# Altium PCB Feeder_1U_NEW.PcbDoc
Units mm, origin at the board's own origin, x right, y up, seen from the top; angles counter-clockwise.
Board outline 51.57 x 89 mm, 4 copper layers (TOP, GND_T, GND_B, BOTTOM), stack 1.484 mm thick; 80 components, 49 nets, 266 pads, 177 vias.
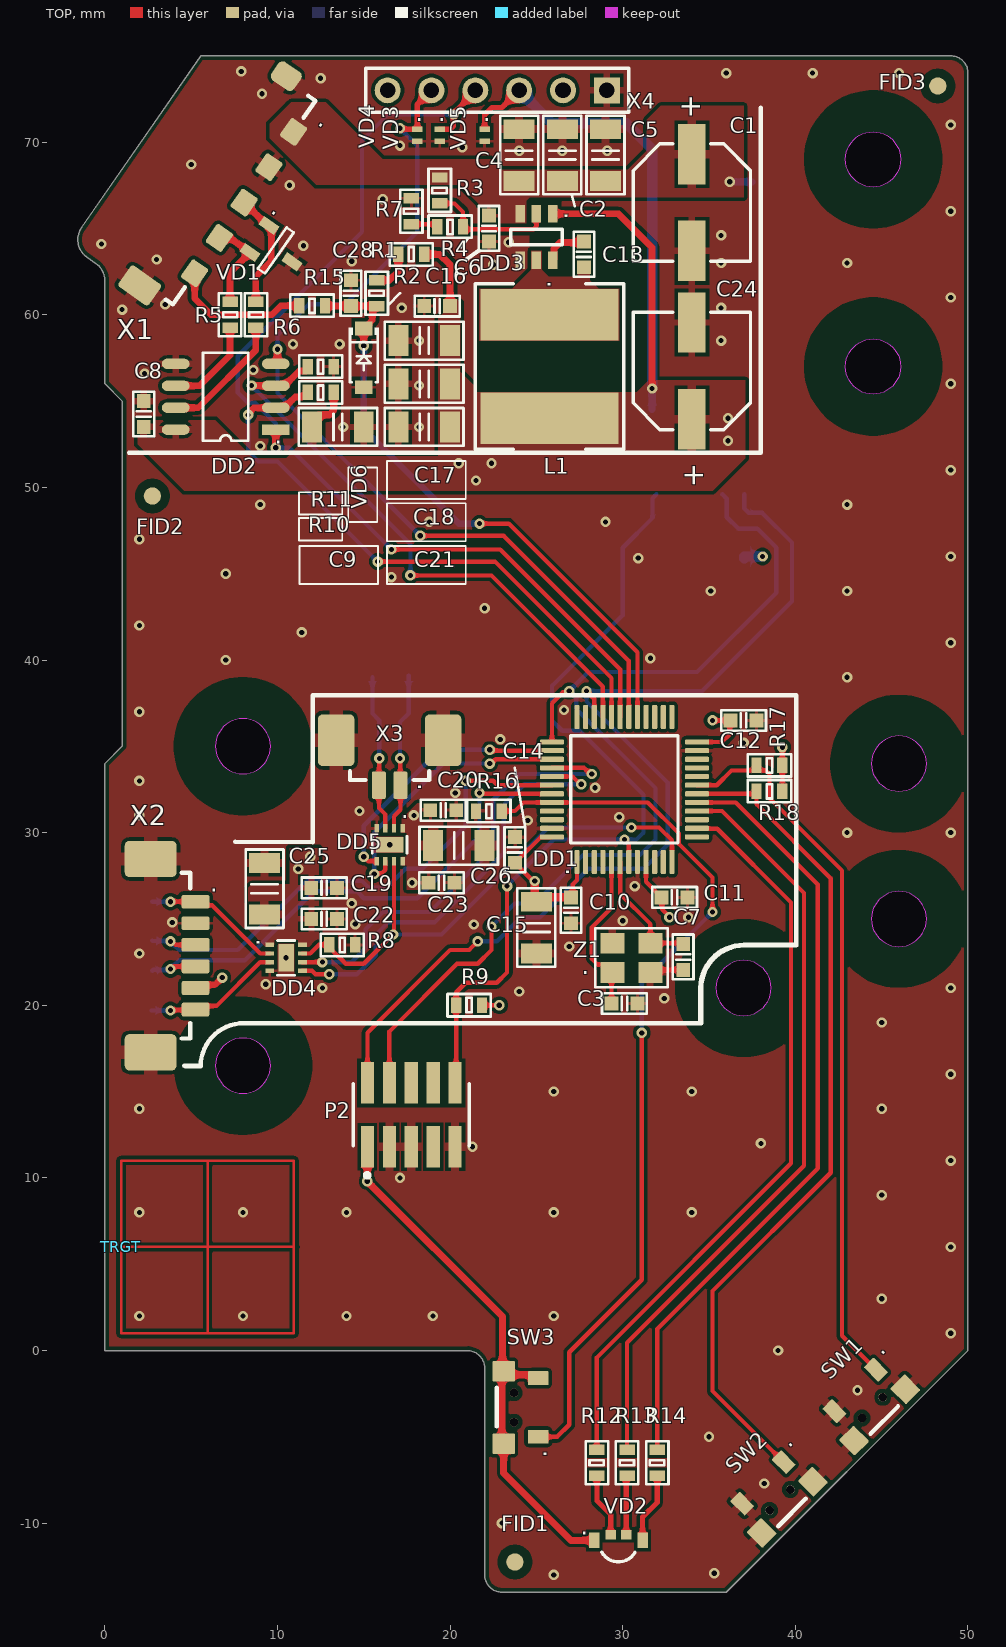
[diagram p0: TOP view]
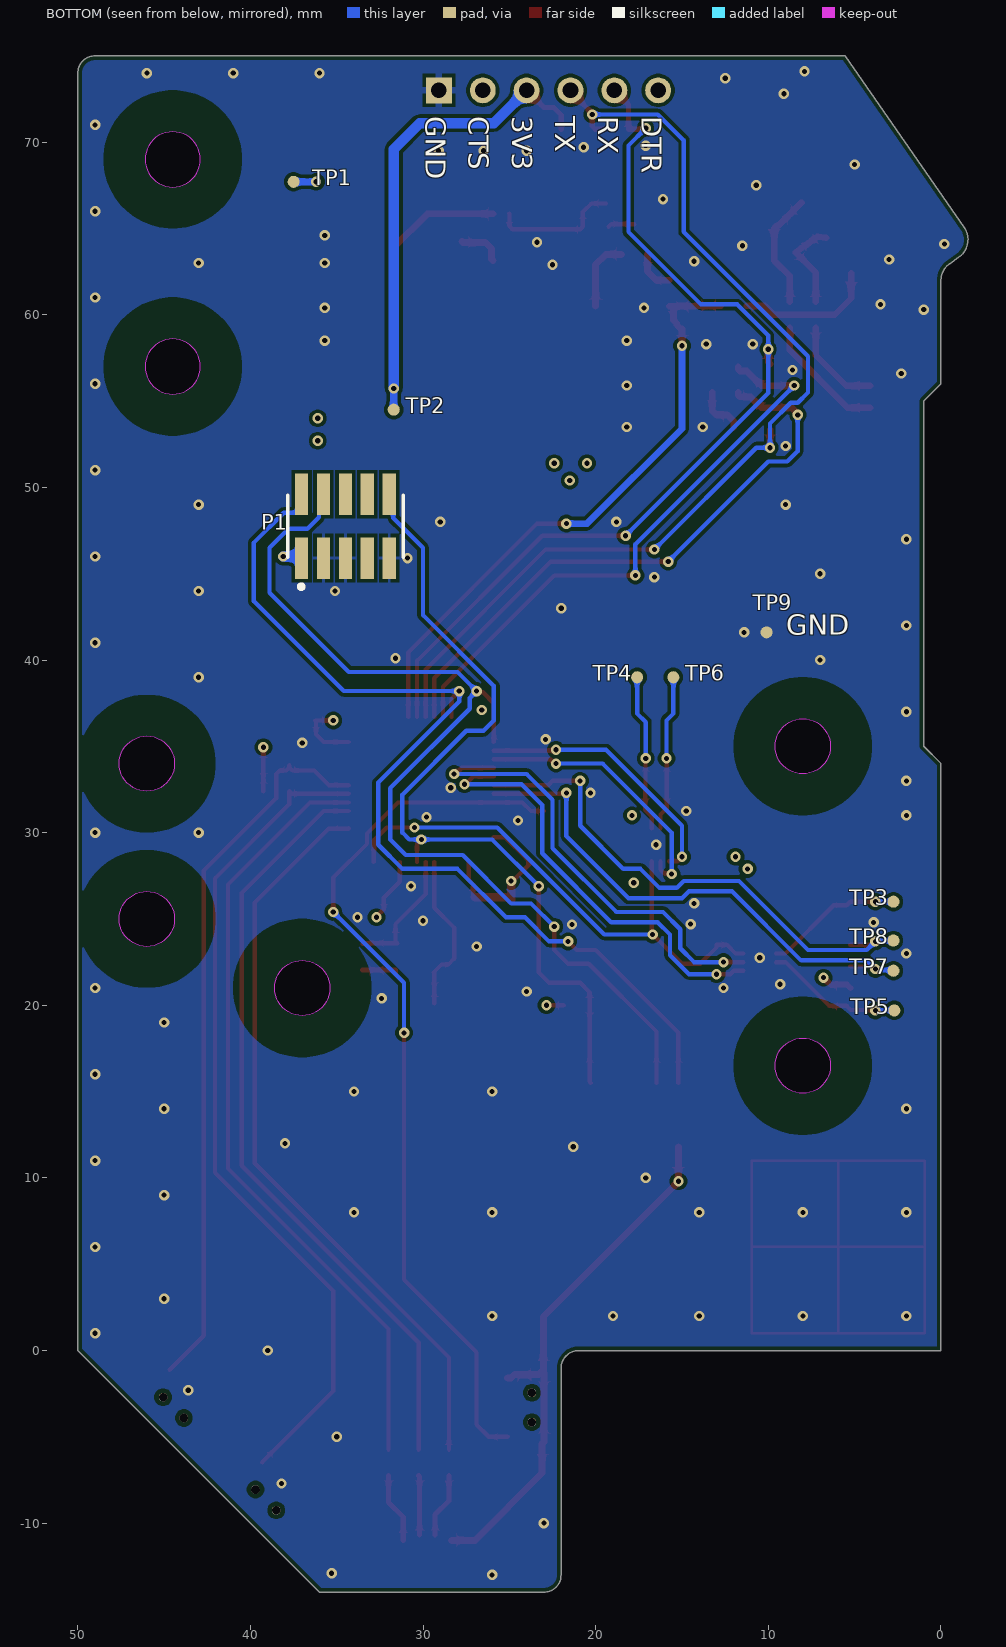
[diagram p1: BOTTOM view, seen from below]
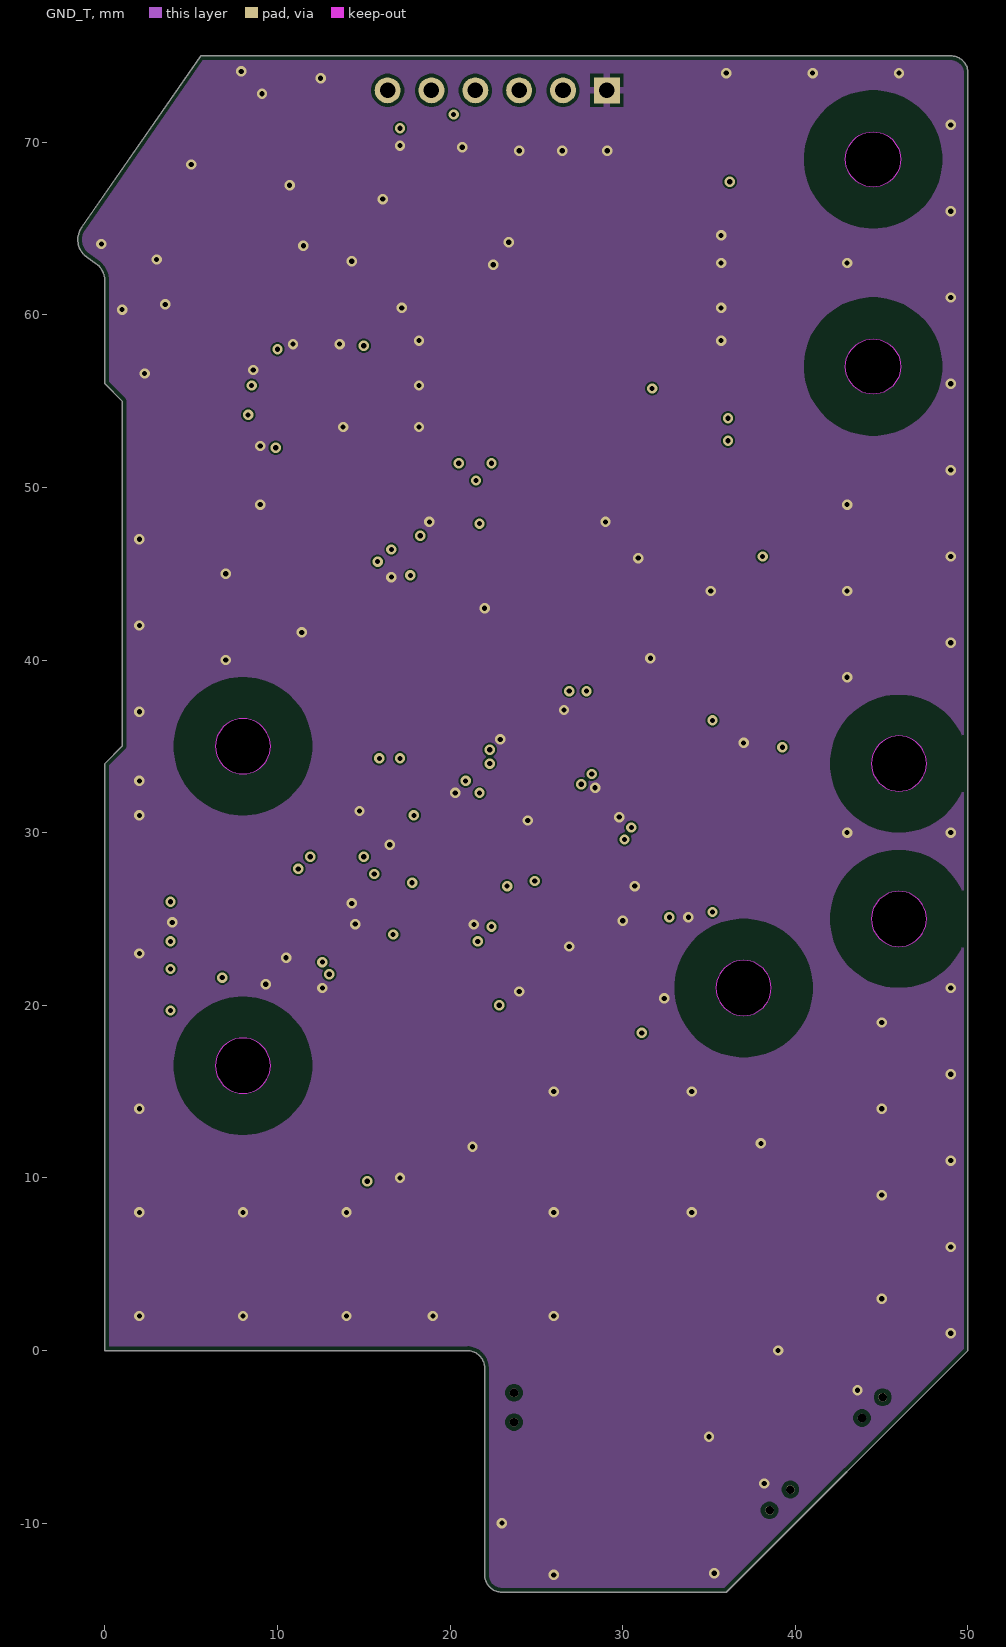
[diagram p2: GND_T]
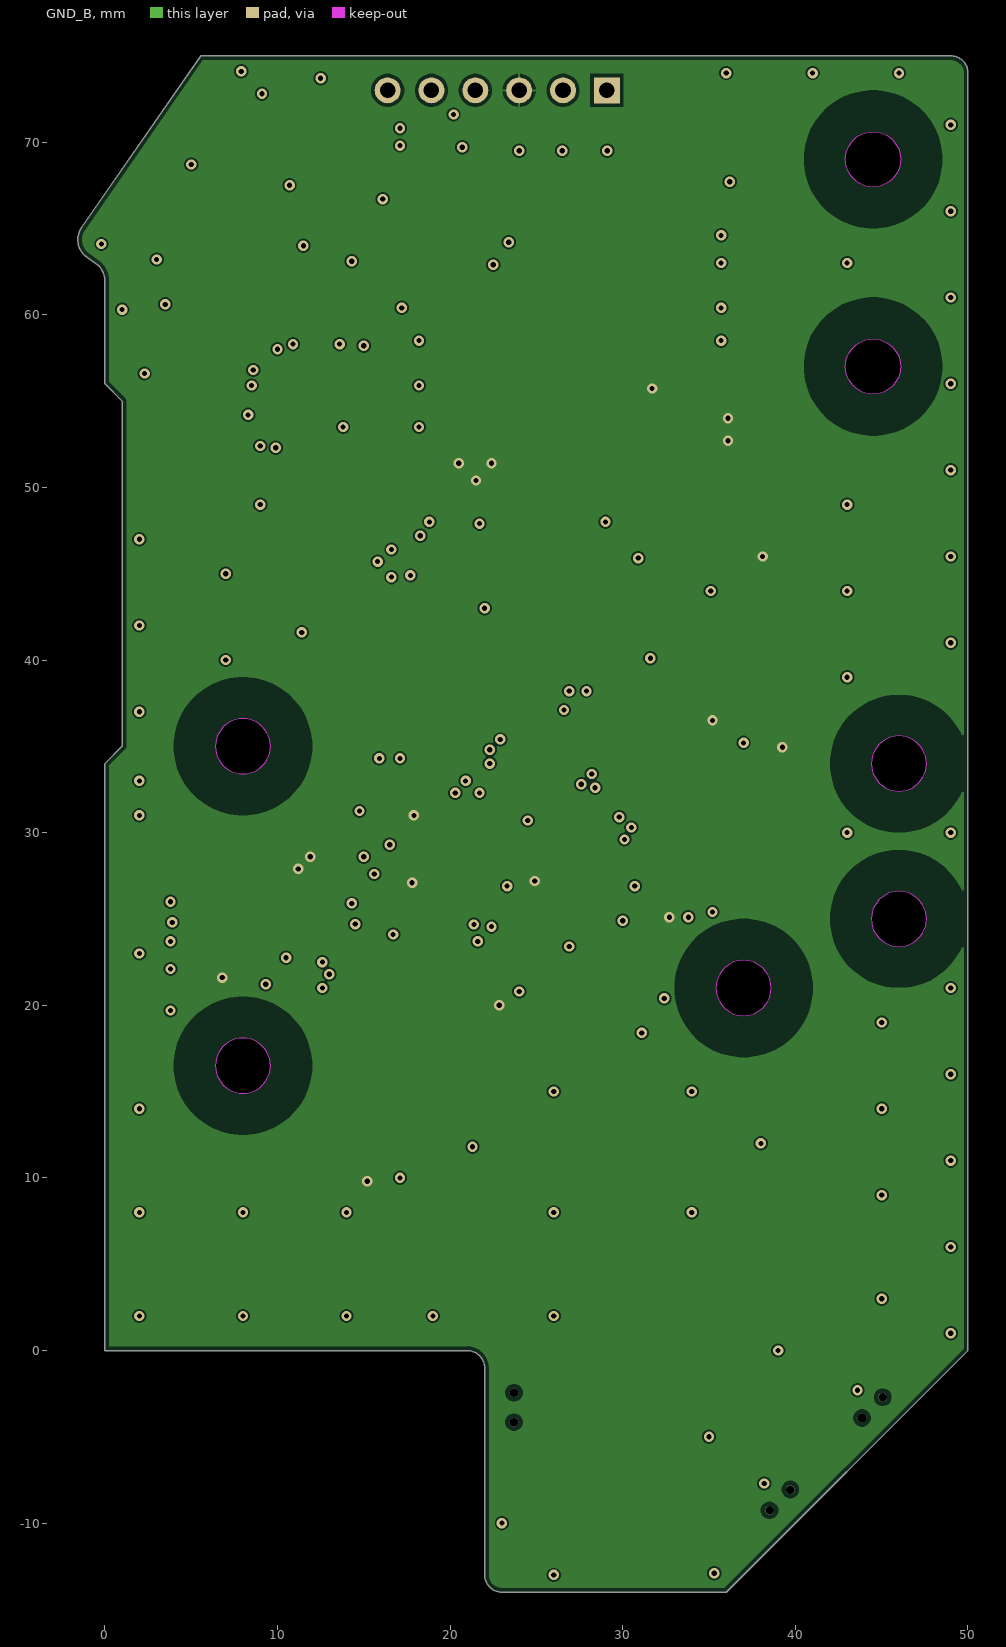
[diagram p3: GND_B]

## Layer stack, top to bottom
Top Solder: solder mask 0.02, Solder Resist, Dk 3.5
TOP: signal copper 0.0175
2116-tg170-l1: prepreg 0.125, FR-4, Dk 5.07
GND_T: signal copper 0.0175
2116-tg170-l4: core 1.164, FR-4, Dk 4.7
GND_B: signal copper 0.0175
2116-tg170-l7: prepreg 0.125, FR-4, Dk 5.07
BOTTOM: signal copper 0.0175
Bottom Solder: solder mask 0.02, Solder Resist, Dk 3.5

## Board outline
0,0 0,34 1,35 1,55 0,56 0,61.925 ccw(c-1.205,61.975) -0.513,62.963 -1.025,63.325 cw(c-0.33,64.349) -1.35,65.05 5.55,75 49,75 cw(c49,74) 50,74 50,0 36,-14 23,-14 cw(c23,-13.007) 22.007,-13 22,-1 ccw(c20.993,-1.014) 20.993,-0.007
cut-out: 42.9,69 cw(c44.5,69) 44.5,70.6 cw(c44.5,69) 46.1,69 cw(c44.5,69) 44.5,67.4 cw(c44.5,69)
cut-out: 44.4,34 ccw(c46,34) 46,32.4 ccw(c46,34) 47.6,34 ccw(c46,34) 46,35.6 ccw(c46,34)
cut-out: 44.4,25 ccw(c46,25) 46,23.4 ccw(c46,25) 47.6,25 ccw(c46,25) 46,26.6 ccw(c46,25)
cut-out: 42.9,57 cw(c44.5,57) 44.5,58.6 cw(c44.5,57) 46.1,57 cw(c44.5,57) 44.5,55.4 cw(c44.5,57)
cut-out: 8,33.4 ccw(c8,35) 9.6,35 ccw(c8,35) 8,36.6 ccw(c8,35) 6.4,35 ccw(c8,35)
cut-out: 35.4,21 ccw(c37,21) 37,19.4 ccw(c37,21) 38.6,21 ccw(c37,21) 37,22.6 ccw(c37,21)
cut-out: 8,14.9 ccw(c8,16.5) 9.6,16.5 ccw(c8,16.5) 8,18.1 ccw(c8,16.5) 6.4,16.5 ccw(c8,16.5)

## Design rules (kind name [scope] priority, off if disabled: settings)
AcuteAngle [All] p1: minimum=3.50000000000000E+0001 checktracksonly=FALSE
BoardOutlineClearance "REZONIT BoardOutlineClearance 1" [All] p1: gap=0.25 ignorepadtopadclearanceinfootprint=FALSE except(0: Arc-SplitContinuation Track-SplitContinuation SMDPad-SplitContinuation THPad-SplitContinuation Via-SplitContinuation Fill-SplitContinuation Poly-SplitContinuation Region-SplitContinuation Text-SplitContinuation) // Milling
BoardOutlineClearance "REZONIT BoardOutlineClearance 2" [All] p2 off: gap=0.4 ignorepadtopadclearanceinfootprint=FALSE except(0: Arc-SplitContinuation Track-SplitContinuation SMDPad-SplitContinuation THPad-SplitContinuation Via-SplitContinuation Fill-SplitContinuation Poly-SplitContinuation Region-SplitContinuation Text-SplitContinuation) // V-Cut
Clearance "REZONIT 3 Oz" [All] p1 off: gap=0.35 ignorepadtopadclearanceinfootprint=FALSE except(0.25: Arc-Hole Track-Hole SMDPad-Hole THPad-Hole Via-Hole Fill-Hole Poly-Hole Region-Hole Text-Hole)
Clearance "REZONIT 2 Oz" [All] p2 off: gap=0.3 ignorepadtopadclearanceinfootprint=FALSE except(0.25: Arc-Hole Track-Hole SMDPad-Hole THPad-Hole Via-Hole Fill-Hole Poly-Hole Region-Hole Text-Hole)
Clearance "REZONIT-USUAL 1 Oz" [All] p3 off: gap=0.2 ignorepadtopadclearanceinfootprint=FALSE except(0.25: Arc-Hole Track-Hole SMDPad-Hole THPad-Hole Via-Hole Fill-Hole Poly-Hole Region-Hole Text-Hole) // Standart
Clearance "REZONIT-ADVANCE 1 Oz" [All] p4 off: gap=0.15 ignorepadtopadclearanceinfootprint=FALSE except(0.2: Arc-Fill Arc-Poly Track-Fill Track-Poly SMDPad-Fill SMDPad-Poly THPad-Fill THPad-Poly Via-Fill Via-Poly Fill-Fill Fill-Poly Poly-Poly; 0.25: Arc-Hole Track-Hole SMDPad-Hole THPad-Hole Via-Hole Fill-Hole Poly-Hole Region-Hole Text-Hole) // Advance
Clearance "REZONIT-USUAL 1/2 Oz" [All] p5: gap=0.125 ignorepadtopadclearanceinfootprint=FALSE except(0.2: Arc-Fill Arc-Poly Track-Fill Track-Poly SMDPad-SMDPad SMDPad-Fill SMDPad-Poly THPad-Fill THPad-Poly Via-Fill Via-Poly Fill-Fill Fill-Poly Poly-Poly Poly-Region Poly-Text; 0.25: Arc-Hole Track-Hole SMDPad-Hole THPad-Hole Via-Hole Fill-Hole Poly-Hole Region-Hole Text-Hole) // Standart
Clearance "REZONIT-ADVANCE-2 1/2 Oz" [All] p6 off: gap=0.1 ignorepadtopadclearanceinfootprint=FALSE except(0.15: Arc-Fill Arc-Poly Track-Fill Track-Poly SMDPad-SMDPad SMDPad-Fill SMDPad-Poly THPad-Fill THPad-Poly Via-Fill Via-Poly Fill-Fill Fill-Poly Poly-Poly Poly-Region Poly-Text; 0.25: Arc-Hole Track-Hole SMDPad-Hole THPad-Hole Via-Hole Fill-Hole Poly-Hole Region-Hole Text-Hole) // Advance
DiffPairsRouting "REZO_DIFF 1 Oz" [All] p1 off: maxlimit=0.254 minlimit=0.2 mostfreqgap=0.254 toplayer_minwidth=0.2 toplayer_maxwidth=0.381 toplayer_prefwidth=0.381 midlayer1_minwidth=0.2 midlayer1_maxwidth=0.381 midlayer1_prefwidth=0.381 midlayer8_minwidth=0.2 midlayer8_maxwidth=0.381 midlayer8_prefwidth=0.381 bottomlayer_minwidth=0.2 bottomlayer_maxwidth=0.381 bottomlayer_prefwidth=0.381 maxuncoupledlength=12.7
DiffPairsRouting "REZO_DIFF 1/2 Oz" [All] p2: maxlimit=0.254 minlimit=0.1 mostfreqgap=0.254 toplayer_minwidth=0.1 toplayer_maxwidth=0.381 toplayer_prefwidth=0.381 midlayer1_minwidth=0.1 midlayer1_maxwidth=0.381 midlayer1_prefwidth=0.381 midlayer8_minwidth=0.1 midlayer8_maxwidth=0.381 midlayer8_prefwidth=0.381 bottomlayer_minwidth=0.1 bottomlayer_maxwidth=0.381 bottomlayer_prefwidth=0.381 maxuncoupledlength=12.7
HoleSize "Minimum HoleSize" [IsPad] p1: absolutevalues=TRUE maxlimit=5.9 minlimit=0.4 maxpercent=80.000 minpercent=20.000
HoleSize "Minimum HoleSize VIA 1" [IsVia] p2 off: absolutevalues=TRUE maxlimit=5.9 minlimit=0.3 maxpercent=80.000 minpercent=20.000 // Standart
HoleSize "Minimum HoleSize VIA 2" [IsVia] p3 off: absolutevalues=TRUE maxlimit=5.9 minlimit=0.2 maxpercent=80.000 minpercent=20.000 // Advance
HoleToHoleClearance Hole2HoleClearance [All] p1: gap=0.25 allowstackedmicrovias=FALSE
MinimumAnnularRing "REZONIT AR VIA Standart" [IsVia] p1: minimumring=0.15
MinimumAnnularRing "REZONIT AR PAD Standart" [IsPAD] p2: minimumring=0.2
MinimumAnnularRing "REZONIT AR VIA Advance" [IsVia] p3: minimumring=0.1
MinimumAnnularRing "REZONIT AR PAD Advance" [IsPAD] p4: minimumring=0.15
MinimumSolderMaskSliver "REZONIT SolderMask Bridge Standart" [All] p1: minsoldermaskwidth=0.15 // All Masks
MinimumSolderMaskSliver "REZONIT SolderMask Bridge Advance" [All] p2 off: minsoldermaskwidth=0.1 // Mask LDI
PasteMaskExpansion [All] p1: expansion=-0.025
PlaneClearance "REZONIT PlaneClearance 3 Oz" [All] p1 off: clearance=0.35
PlaneClearance "REZONIT PlaneClearance 2 Oz" [All] p2 off: clearance=0.3
PlaneClearance "REZONIT PlaneClearance 1 Oz" [All] p3 off: clearance=0.2
PlaneClearance "REZONIT PlaneClearance-1 1/2 Oz" [All] p4: clearance=0.2 // Standart
PlaneClearance "REZONIT PlaneClearance-2 1/2 Oz" [All] p5 off: clearance=0.15 // Advance
PlaneConnect "REZONIT TermalConnect 3 Oz" [All] p1 off: planeconnectstyle=Relief reliefexpansion=0.2 reliefentries=4 reliefconductorwidth=0.35 reliefairgap=0.35 // Standart
PlaneConnect "REZONIT TermalConnect 2 Oz" [All] p2 off: planeconnectstyle=Relief reliefexpansion=0.2 reliefentries=4 reliefconductorwidth=0.3 reliefairgap=0.3 // Standart
PlaneConnect "REZONIT TermalConnect-1 1 Oz" [All] p3 off: planeconnectstyle=Relief reliefexpansion=0.2 reliefentries=4 reliefconductorwidth=0.2 reliefairgap=0.2 // Standart
PlaneConnect "REZONIT TermalConnect-2 1 Oz" [All] p4 off: pad.planeconnectstyle=Relief pad.reliefexpansion=0.15 pad.reliefentries=4 pad.reliefconductorwidth=0.2 pad.reliefairgap=0.2 via.planeconnectstyle=Direct via.reliefexpansion=0.15 via.reliefentries=4 via.reliefconductorwidth=0.15 via.reliefairgap=0.15 // Advance
PlaneConnect "REZONIT TermalConnect-1 1/2 Oz" [All] p5: planeconnectstyle=Relief reliefexpansion=0.2 reliefentries=4 reliefconductorwidth=0.2 reliefairgap=0.2 // Standart
PlaneConnect "REZONIT TermalConnect-2 1/2 Oz" [All] p6 off: pad.planeconnectstyle=Relief pad.reliefexpansion=0.15 pad.reliefentries=4 pad.reliefconductorwidth=0.15 pad.reliefairgap=0.15 via.planeconnectstyle=Direct via.reliefexpansion=0.15 via.reliefentries=4 via.reliefconductorwidth=0.15 via.reliefairgap=0.15 // Advance
PolygonConnect "REZONIT PolygonConnect 3 Oz" [All] p1 off: thpad.connectstyle=Relief thpad.reliefconductorwidth=0.35 thpad.reliefentries=4 thpad.polygonreliefangle="90 Angle" thpad.airgapwidth=0.35 smdpad.connectstyle=Relief smdpad.reliefconductorwidth=0.35 smdpad.reliefentries=4 smdpad.polygonreliefangle="90 Angle" smdpad.airgapwidth=0.35 via.connectstyle=Direct via.reliefconductorwidth=0.254 via.reliefentries=4 via.polygonreliefangle="90 Angle" via.airgapwidth=0.254
PolygonConnect "REZONIT PolygonConnect 2 Oz" [All] p2 off: thpad.connectstyle=Relief thpad.reliefconductorwidth=0.3 thpad.reliefentries=4 thpad.polygonreliefangle="90 Angle" thpad.airgapwidth=0.3 smdpad.connectstyle=Relief smdpad.reliefconductorwidth=0.3 smdpad.reliefentries=4 smdpad.polygonreliefangle="90 Angle" smdpad.airgapwidth=0.3 via.connectstyle=Direct via.reliefconductorwidth=0.254 via.reliefentries=4 via.polygonreliefangle="90 Angle" via.airgapwidth=0.254
PolygonConnect "REZONIT PolygonConnect-1 1 Oz" [All] p3 off: thpad.connectstyle=Relief thpad.reliefconductorwidth=0.2 thpad.reliefentries=4 thpad.polygonreliefangle="90 Angle" thpad.airgapwidth=0.2 smdpad.connectstyle=Relief smdpad.reliefconductorwidth=0.2 smdpad.reliefentries=4 smdpad.polygonreliefangle="90 Angle" smdpad.airgapwidth=0.2 via.connectstyle=Direct via.reliefconductorwidth=0.254 via.reliefentries=4 via.polygonreliefangle="90 Angle" via.airgapwidth=0.254 // Standart
PolygonConnect "REZONIT PolygonConnect-2 1 Oz" [All] p4 off: thpad.connectstyle=Relief thpad.reliefconductorwidth=0.15 thpad.reliefentries=4 thpad.polygonreliefangle="90 Angle" thpad.airgapwidth=0.15 smdpad.connectstyle=Relief smdpad.reliefconductorwidth=0.15 smdpad.reliefentries=4 smdpad.polygonreliefangle="90 Angle" smdpad.airgapwidth=0.15 via.connectstyle=Direct via.reliefconductorwidth=0.254 via.reliefentries=4 via.polygonreliefangle="90 Angle" via.airgapwidth=0.254 // Advance
PolygonConnect "REZONIT PolygonConnect-1 1/2 Oz" [All] p5: thpad.connectstyle=Relief thpad.reliefconductorwidth=0.15 thpad.reliefentries=4 thpad.polygonreliefangle="90 Angle" thpad.airgapwidth=0.2 smdpad.connectstyle=Relief smdpad.reliefconductorwidth=0.2 smdpad.reliefentries=4 smdpad.polygonreliefangle="90 Angle" smdpad.airgapwidth=0.2 via.connectstyle=Direct via.reliefconductorwidth=0.254 via.reliefentries=4 via.polygonreliefangle="90 Angle" via.airgapwidth=0.254 // Standart
PolygonConnect "REZONIT PolygonConnect-2 1/2 Oz" [All] p6 off: thpad.connectstyle=Relief thpad.reliefconductorwidth=0.125 thpad.reliefentries=4 thpad.polygonreliefangle="90 Angle" thpad.airgapwidth=0.15 smdpad.connectstyle=Relief smdpad.reliefconductorwidth=0.125 smdpad.reliefentries=4 smdpad.polygonreliefangle="90 Angle" smdpad.airgapwidth=0.15 via.connectstyle=Direct via.reliefconductorwidth=0.254 via.reliefentries=4 via.polygonreliefangle="90 Angle" via.airgapwidth=0.254 // Advance
RoutingCorners [All] p1 off: cornerstyle=45-Degree minsetback=2.54 maxsetback=2.54
RoutingVias [All] p1: holewidth=0.3 width=0.6 viastyle="Through Hole" minholewidth=0.2 minwidth=0.4 maxholewidth=5.9 maxwidth=6.4
SilkToSilkClearance Silk2SilkClearance [All] p1 off: silktosilkclearance=0.15
SilkToSolderMaskClearance Silk2SolderMaskClearance [IsPad] p1 off: minsilkscreentomaskgap=0.15 clearancetoexposedcopper=TRUE
SolderMaskExpansion "REZONIT MaskExpansion-1" [All] p1: expansion=0.05 istentingtop=FALSE // Standart
SolderMaskExpansion "REZONIT LDI" [All] p2 off: expansion=0.025 istentingtop=FALSE // Advance
SupplyNets "Schematic Supply Nets_2" [InNet('3V3')] p1: voltage=0.000
SupplyNets "Schematic Supply Nets_1" [InNet('24V0')] p2: voltage=0.000
SupplyNets "Schematic Supply Nets" [InNet('GND')] p3: voltage=0.000
UnRoutedNet [All] p1: checkbadconnections=TRUE
Width "REZO 3 Oz" [All] p1 off: maxlimit=10 minlimit=0.35 preferedwidth=0.4 checkconnectedcopper=TRUE
Width "REZO 2 Oz" [All] p2 off: maxlimit=10 minlimit=0.3 preferedwidth=0.35 minimp=50.000000 maximp=50.000000 favimp=50.000000 checkconnectedcopper=TRUE
Width "REZO 1 Oz" [All] p3 off: maxlimit=10 minlimit=0.15 preferedwidth=0.2 checkconnectedcopper=TRUE
Width "REZO 1/2 Oz" [All] p4: maxlimit=10 minlimit=0.1 preferedwidth=0.125 checkconnectedcopper=TRUE
19 further rules are at their usual default settings.

## Components (designator, comment, footprint, x,y, rotation, side; value= is the part's Value field where it differs from the comment)
C1 "47μF" WCAP-ASLI_D6.3H7.7 34,66.5 r90 top
C2 "CL31B106KBHNNNE" C_1206 26.5,69.25 r270 top value="10 uF"
C3 "CC0603JRNPO9BN120" C_0603 30.1,20.1 r0 top value="12 pF"
C4 "CL31B106KBHNNNE" C_1206 24,69.25 r270 top value="10 uF"
C5 "CL31B106KBHNNNE" C_1206 29,69.25 r270 top value="10 uF"
C6 "CC0603KRX7R9BB104" C_0603 22.25,65 r90 top value="100 nF"
C7 "CC0603JRNPO9BN120" C_0603 33.5,22.8 r270 top value="12 pF"
C8 "CC0603KRX7R9BB104" C_0603 2.25,54.25 r270 top value="100 nF"
C9 "CL31B106KBHNNNE" C_1206 13.5,53.5 r180 top value="10 uF"
C10 "CC0603KRX7R9BB104" C_0603 27,25.5 r90 top value="100 nF"
C11 "CC0603KRX7R9BB104" C_0603 33,26.25 r180 top value="100 nF"
C12 "CC0603KRX7R9BB104" C_0603 37,36.5 r180 top value="100 nF"
C13 "CC0603KRX7R9BB104" C_0603 27.75,63.5 r90 top value="100 nF"
C14 "CC0603KRX7R9BB104" C_0603 23.75,29 r270 top value="100 nF"
C15 "CL31B106KBHNNNE" C_1206 25,24.5 r90 top value="10 uF"
C16 "CC0603KRX7R9BB104" C_0603 19.25,60.5 r0 top value="100 nF"
C17 "CL31B106KBHNNNE" C_1206 18.5,58.5 r0 top value="10 uF"
C18 "CL31B106KBHNNNE" C_1206 18.5,56 r0 top value="10 uF"
C19 "CC0603KRX7R9BB104" C_0603 12.7,26.8 r180 top value="100 nF"
C20 "CC0603KRX7R9BB104" C_0603 19.6,31.3 r180 top value="100 nF"
C21 "CL31B106KBHNNNE" C_1206 18.5,53.5 r0 top value="10 uF"
C22 "CC0603KRX7R9BB104" C_0603 12.7,25 r180 top value="100 nF"
C23 "CC0603KRX7R9BB104" C_0603 19.5,27.1 r180 top value="100 nF"
C24 "47μF" WCAP-ASLI_D6.3H7.7 34,56.75 r270 top
C25 "CL31B106KBHNNNE" C_1206 9.25,26.75 r270 top value="10 uF"
C26 "CL31B106KBHNNNE" C_1206 20.5,29.25 r180 top value="10 uF"
C28 "CC0603JRNPO9BN120" C_0603 14.25,61.25 r90 top value="12 pF"
DD1 "STM32F030C8T6" QFP-48 30.1,32.5 r90 top
DD2 "MAX3078E" SOP8 7,55.25 r180 top
DD3 "AP63203WU-7" TSOT-23-6 25,64.5 r270 top
DD4 "DRV8837DSGR" WSON-8 10.5,22.75 r0 top
DD5 "DRV8837DSGR" WSON-8 16.5,29.3 r270 top
FID1 "FID" FIDUCIAL 23.75,-12.25 r0 top
FID2 "FID" FIDUCIAL 2.75,49.5 r0 top
FID3 "FID" FIDUCIAL 48.25,73.25 r0 top
L1 "SDR0805-3R9ML" IND_SDR0805 25.75,57 r270 top value="3.9 uH"
P1 "62101021021" 62101021021 34.5,47.75 r180 bottom locked
P2 "62101021021" 62101021021 17.75,13.65 r0 top locked
R1 "RC0603FR-07390RL" R_0603 17.75,63.5 r180 top value="390 R"
R2 "RC0603FR-07390RL" R_0603 15.75,61.25 r270 top value="390 R"
R3 "RC0603FR-0710KL" R_0603 19.4,67.2 r270 top value="10 kR"
R4 "RC0603FR-07390RL" R_0603 20,65.1 r0 top value="390 R"
R5 "RC0603FR-075R1L" R_0603 7.25,60 r90 top value="5.1 R"
R6 "RC0603FR-075R1L" R_0603 8.75,60 r90 top value="5.1 R"
R7 "RC0603FR-07390RL" R_0603 17.75,66 r270 top value="390 R"
R8 "RC0603FR-0710KL" R_0603 13.75,23.5 r0 top value="10 kR"
R9 "RC0603FR-0710KL" R_0603 21.1,20 r180 top value="10 kR"
R10 "RC0603FR-071ML" R_0603 12.5,55.5 r0 top value="1 MR"
R11 "RC0603FR-071ML" R_0603 12.5,57 r0 top value="1 MR"
R12 "RC0603FR-07390RL" R_0603 28.5,-6.5 r270 top value="390 R"
R13 "RC0603FR-07390RL" R_0603 30.25,-6.5 r270 top value="390 R"
R14 "RC0603FR-07390RL" R_0603 32,-6.5 r270 top value="390 R"
R15 "RC0603FR-07240RL" R_0603 12,60.525 r0 top value="240 R"
R16 "RC0603FR-0710KL" R_0603 22.25,31.25 r0 top value="10 kR"
R17 "RC0603FR-0710KL" R_0603 38.5,33.9 r0 top value="10 kR"
R18 "RC0603FR-0710KL" R_0603 38.5,32.4 r0 top value="10 kR"
SW1 "TS24CA" TS24CA 44.175,-3.025 r45 top
SW2 "TS24CA" TS24CA 38.825,-8.375 r45 top
SW3 "TS24CA" TS24CA 24.1,-3.3 r270 top
TP1 "*" "TEST POINT ROUND" 37.5,67.7 r180 bottom
TP2 "*" "TEST POINT ROUND" 31.7,54.5 r180 bottom
TP3 "*" "TEST POINT ROUND" 2.75,26 r180 bottom
TP4 "*" "TEST POINT ROUND" 17.6,39 r180 bottom
TP5 "*" "TEST POINT ROUND" 2.7,19.7 r180 bottom
TP6 "*" "TEST POINT ROUND" 15.5,39 r180 bottom
TP7 "*" "TEST POINT ROUND" 2.75,22 r180 bottom
TP8 "*" "TEST POINT ROUND" 2.75,23.75 r180 bottom
TP9 "*" "TEST POINT ROUND" 10.1,41.6 r180 bottom
TRGT "10mm" PrinterTarget 0.95,6 r0 top
VD1 "SM712" SOT23 9.9,63.725 r325 top value="15 V"
VD2 "155124M173200" LED_3210_RGB_SIDE 29.75,-11.5 r0 top
VD3 "PESD3V3S1UL,315" DFN1006-2_(SOD882) 19.4,70.4 r270 top value="3.3 V"
VD4 "PESD3V3S1UL,315" DFN1006-2_(SOD882) 18.1,70.4 r270 top value="3.3 V"
VD5 "PESD3V3S1UL,315" DFN1006-2_(SOD882) 22,70.4 r270 top value="3.3 V"
VD6 "MMSZ4684T1G" SOD-123 15,57.5 r270 top
X1 "009155005541006" 009155005541006 5.692,68.161 r235 top
X2 "532610671" 532610671 4.75,22.875 r270 top
X3 "532610271" 532610271 16.5,33.25 r180 top
X4 "PLS-6" PLS-6-3D 29.08,73 r180 top
Z1 "X32258MOB4SI" SMD3225 30.5,22.75 r0 top value="8 MHz"

## Footprints (in the part's own frame and the unit in brackets; to place one, negate y for a bottom-side part, rotate by r counter-clockwise, add the part's x,y. Pads: shape width x height; smd on the part's side, far side on the other; paste and mask are expansions set on the pad)
532610271 [mm] "Molex PicoBlade SMD 2pin"
  rrect25% 0.8x1.6 smd: 1(-0.625,0.5) 2(0.625,0.5)
  rrect25% 2.1x3 smd: P1(-3.1,-2.1) P2(3.1,-2.1)
  silkscreen extent -2.3,-0.3 2.3,0.2, body extent -3.83,-4.2 3.83,1, height 3.5
532610671 [mm] "Molex PicoBlade SMD 6pin"
  rrect25% 0.8x1.6 smd: 1(-3.125,0.5) 2(-1.875,0.5) 3(-0.625,0.5) 4(0.625,0.5) 5(1.875,0.5) 6(3.125,0.5)
  rrect25% 2.1x3 smd: P1(-5.6,-2.1) P2(5.6,-2.1)
  silkscreen extent -4.8,-0.3 4.8,0.2, body extent -6.32,-4.2 6.32,1, height 3.5
62101021021 [mm] "Pin Header, pitch 1.27 mm, SMD, Vertical, dual row, 10p"
  rect 0.76x2.4 smd: 1(-2.54,-1.85) 2(-2.54,1.85) 3(-1.27,-1.85) 4(-1.27,1.85) 5(0,-1.85) 6(0,1.85) 7(1.27,-1.85) 8(1.27,1.85) 9(2.54,-1.85) 10(2.54,1.85)
  silkscreen extent -3.35,-3.62 3.35,1.8, body extent -3.17,-2.5 3.18,2.5, height 5.9
009155005541006 [mm] "Kyocera AVX"
  rrect25% 1.3x1.15 smd: 1(-5,2.9) 2(-2.5,2.9) 3(0,2.9) 4(2.5,2.9) 5(5,2.9)
  rrect50% 1.3x1.6 smd: P1(-7.4,0.7)
  rrect25% 1.5x2.15 smd: P2(7.4,0.7)
  silkscreen extent -7.2,2.4 7.2,2.9, body extent -7.5,-3.3 7.5,3.2, height 3.9
C_0603 [mm] "Chip Capacitor; Body 1.6 x 0.8 mm (LxW typ)"
  rect 0.8x0.8 smd: 1(-0.75,0) 2(0.75,0)
  silkscreen extent -1.3,-0.6 1.3,0.6, body extent -0.8,-0.4 0.8,0.4, height 0.3
C_1206 [mm]
  rect 1.15x1.8 smd: 1(-1.5,0) 2(1.5,0)
  silkscreen extent -2.27,-1.1 2.27,1.1, body extent -1.6,-0.8 1.6,0.8, height 1
DFN1006-2_(SOD882) [mm] "DFN, 2-Leads, Body 0,59x0,99mm, Pitch 0,65mm, IPC Medium Density"
  rect 0.3x0.6 smd: 1(-0.35,0) 2(0.35,0)
  body extent -0.51,-0.31 0.51,0.31, height 0.5
FIDUCIAL [mm] "FID_POINT_1mm"
  round 1 smd paste-2539.97 mask+0.5: FID(0,0)
  TOP pour cut-out: 0,1 0.383,0.924 0.707,0.707 0.924,0.383 1,0 1,0 0.924,-0.383 0.707,-0.707 0.383,-0.924 0,-1 0,-1 -0.383,-0.924 -0.707,-0.707 -0.924,-0.383 -1,0 -1,0 -0.924,0.383 -0.707,0.707 -0.383,0.924 0,1
IND_SDR0805 [mm] "SMD unshielded Power Inductor, 2-leads, body 7.8x7.8mm"
  rect 3x8 smd: 1(-3,0) 2(3,0)
  silkscreen extent -4.8,-4.3 4.8,4.3, body extent -3.9,-3.9 3.9,3.9, height 5.3
LED_3210_RGB_SIDE [mm] "SMD Full-color Side view Waterclear, body 3.2x1mm"
  rect 0.6x0.9 smd: 1(-1.4,0.5) 4(1.4,0.5)
  rect 0.6x0.55 smd: 2(-0.45,0.825) 3(0.45,0.825)
  silkscreen extent -0.96,-0.75 0.96,-0.19, body extent -1.6,-0.73 1.6,0.77, height 1.02
PLS-6-3D [mm] "Connector; Header; 6 Position"
  rect 1.5x1.5 hole 0.9: 1(0,0)
  round 1.5 hole 0.9: 2(2.54,0) 3(5.08,0) 4(7.62,0) 5(10.16,0) 6(12.7,0)
  silkscreen extent -1.27,-1.27 13.97,1.27, body extent -1.27,-1.27 13.97,1.27, height 8.44
PrinterTarget [mm] "10mm calobration targer"
  TOP lines w0.15: 0,0 10,0 ; 5,-5 5,5 ; 0,-5 0,5 10,5 10,-5 0,-5
QFP-48 [mm] "TSQFP, 48-Leads, Body 7,00x7,00mm, Pitch 0,50mm, IPC Medium Density"
  rrect50% 1.4x0.3 smd: 1(-4.2,2.75) 2(-4.2,2.25) 3(-4.2,1.75) 4(-4.2,1.25) 5(-4.2,0.75) 6(-4.2,0.25) 7(-4.2,-0.25) 8(-4.2,-0.75) 9(-4.2,-1.25) 10(-4.2,-1.75) 11(-4.2,-2.25) 12(-4.2,-2.75) 25(4.2,-2.75) 26(4.2,-2.25) 27(4.2,-1.75) 28(4.2,-1.25) 29(4.2,-0.75) 30(4.2,-0.25) 31(4.2,0.25) 32(4.2,0.75) 33(4.2,1.25) 34(4.2,1.75) 35(4.2,2.25) 36(4.2,2.75)
  rrect50% 0.3x1.4 smd: 13(-2.75,-4.2) 14(-2.25,-4.2) 15(-1.75,-4.2) 16(-1.25,-4.2) 17(-0.75,-4.2) 18(-0.25,-4.2) 19(0.25,-4.2) 20(0.75,-4.2) 21(1.25,-4.2) 22(1.75,-4.2) 23(2.25,-4.2) 24(2.75,-4.2) 37(2.75,4.2) 38(2.25,4.2) 39(1.75,4.2) 40(1.25,4.2) 41(0.75,4.2) 42(0.25,4.2) 43(-0.25,4.2) 44(-0.75,4.2) 45(-1.25,4.2) 46(-1.75,4.2) 47(-2.25,4.2) 48(-2.75,4.2)
  silkscreen extent -3.1,-3.1 3.1,3.1, body extent -4.5,-4.5 4.5,4.5, height 1.6
R_0603 [mm]
  rect 0.6x0.9 smd: 1(-0.75,0) 2(0.75,0)
  silkscreen extent -1.25,-0.65 1.25,0.65, body extent -0.8,-0.41 0.8,0.41, height 0.45
SMD3225 [mm] "Crystal"
  rect 1.4x1.2 smd: 1(-1.1,-0.85) 2(1.1,-0.85) 3(1.1,0.85) 4(-1.1,0.85)
  silkscreen extent -2.1,-1.7 2.1,1.7, body extent -1.6,-1.25 1.6,1.25, height 1.05
SOD-123 [mm]
  rect 0.8x1 smd: 1(-1.7,0) 2(1.7,0)
  silkscreen extent -1.75,-0.88 1.4,0.88, body extent -1.85,-0.8 1.85,0.8, height 1.27
SOP8 [mm]
  rect 1.6x0.6 smd: 1(-2.9,1.905)
  oval 1.6x0.6 smd: 2(-2.9,0.635) 3(-2.9,-0.635) 4(-2.9,-1.905) 5(2.9,-1.905) 6(2.9,-0.635) 7(2.9,0.635) 8(2.9,1.905)
  silkscreen extent -1.32,-2.54 1.32,2.54, body extent -3.1,-2.49 3.1,2.51, height 1.75
SOT23 [mm]
  rect 1.1x0.6 smd: 1(-1.15,0.95) 2(-1.15,-0.95) 3(1.15,0)
  silkscreen extent -0.25,-1.45 0.25,1.45, body extent -1.3,-1.45 1.3,1.45, height 1.1
"TEST POINT ROUND" [mm]
  round 0.7 smd paste-2539.97: 1(0,0)
TS24CA [mm] "SWITCH TACTILE SPST SMD R/A"
  rrect12% 0.8x1.2 smd: 1(1.7,1) 2(-1.7,1)
  rrect12% 1.2x1.3 smd: 3(-2.1,-1) 4(2.1,-1)
  round 0.5 hole 0.5 unplated paste-2539.97: O10(-0.85,-0.4) O10(0.85,-0.4)
  silkscreen extent -1.15,-1.4 1.1,-1.4, body extent -2.37,-2.63 2.34,1.09, height 1.93
TSOT-23-6 [mm] "SOT23, 6-Leads, Body 2,90x2,80mm, Pitch 0,95mm, IPC Medium Density"
  rect 1x0.55 smd: 1(-1.35,0.95) 2(-1.35,0) 3(-1.35,-0.95) 4(1.35,-0.95) 5(1.35,0) 6(1.35,0.95)
  silkscreen extent -0.45,-1.5 0.45,1.5, body extent -1.4,-1.5 1.4,1.5, height 0.9
WCAP-ASLI_D6.3H7.7 [mm] "Aluminium Electrolytic V-Chip SMT Capacitors, 6.3x7.7mm"
  rect 3.5x1.6 smd: 1(2.8,0) 2(-2.8,0)
  silkscreen extent -3.4,-3.4 3.4,3.4, body extent -3.65,-3.3 3.65,3.3, height 7.7
WSON-8 [mm]
  rect 0.5x0.25 smd mask+0.13: 1(-0.95,0.75) 2(-0.95,0.25) 3(-0.95,-0.25) 4(-0.95,-0.75) 5(0.95,-0.75) 6(0.95,-0.25) 7(0.95,0.25) 8(0.95,0.75)
  rect 0.9x1.6 smd mask+0.125: 9(0,0)
  silkscreen extent -0.5,-1 0.5,1, body extent -1,-1 1,1, height 0.75

## Part data
C1 C24: library part 865080645012, "WCAP-ASLI Aluminum Electrolytic Capacitor, V-Chip, SMT, 6.3mm x 7.7mm, 47μF, 50V", Leakage Current=23.5μA, Manufacturer="Wurth Elektronik", Max Operating Temperature=105°C, Min Operating Temperature=-55°C, Rated Voltage (DC)=50V, Ripple Current=230mA, Capacitance=47μF, Category="Aluminum Electrolytic Capacitors", ComponentLink1Description="Website Link", ComponentLink1URL=https://www.we-online.com/redexpert/article/865080645012?ad, ComponentLink2Description="Datasheet Link", ComponentLink2URL=https://www.we-online.com/redexpert/spec/865080645012?ad, Diameter=6.3mm, Dissipation Factor=12%, Endurance=2000h, Height=7.7mm, Impedance=700mΩ, Manufacturer Part Number=865080645012, Match Code=WCAP-ASLI, Mount="Surface Mount", Packaging="Tape and Reel"
C2 C4 C5 C9 C15 C17 C18 C21 C25 C26: "C1206 10uF X7R 50V", AnalogPartNumber=TCC1206X7R106K500HT, Height Tolerance=0.2, lcsc.com=C89632, Manufacturer=Samsung, Power/Voltage=50V, Tolerance=±10%, GroupSpecification=4, Height=1.6, ManufacturerPartNumber=CL31B106KBHNNNE, Mount=SMT, Storage Category=Пассивные, Storage Subcategory="Конденсаторы керамические", Technological stock=2%, Type=X7R, Корпус=1206
C3 C7 C28: "C0603 12pF 50V", AnalogPartNumber="GRM1885C1H120J, TCC0603COG120J500CT, 0603CG120J500NT", Height Tolerance=0.1, lcsc.com=C107034, Manufacturer=YAGEO, Power/Voltage=50V, Tolerance=±5%, ChipDip.ru=9000174425, GroupSpecification=4, Height=0.8, ManufacturerPartNumber=CC0603JRNPO9BN120, Mount=SMT, Storage Category=Пассивные, Storage Subcategory="Конденсаторы керамические", Technological stock=5%, Type=NP0, Корпус=0603
C6 C8 C10 C11 C12 C13 C14 C16 C19 C20 C22 C23: "C0603 100nF X7R ±10% 50V", Height Tolerance=0.1, lcsc.com=C14663, Manufacturer=YAGEO, Power/Voltage=50V, Tolerance=10%, ChipDip.ru=9000073755, GroupSpecification=4, Height=0.8, ManufacturerPartNumber=CC0603KRX7R9BB104, Mount=SMT, Storage Category=Пассивные, Storage Subcategory="Конденсаторы керамические", Technological stock=5%, Type=X7R, Корпус=0603
DD1: "MCU STM32 ARM Cortex-M0 32Bit 48MHz", lcsc.com=C23922, Manufacturer=STM, ChipDip.ru=9000222650, GroupSpecification=4, ManufacturerPartNumber=STM32F030C8T6, Mount=SMT, Storage Category="Интегральные микросхемы", Storage Subcategory="Микросхемы цифровые", Technological stock=1%, Корпус=QFP-48
DD2: "RS-485 Line Driver and Receiver", AnalogPartNumber=MAX3078EM/TR, lcsc.com=C336020, Manufacturer=Maxim, ManufacturerPartNumber=MAX3078EESA+T, ChipDip.ru=8004571231, GroupSpecification=4, Mount=SMT, Storage Category="Интегральные микросхемы", Storage Subcategory="Микросхемы цифровые", Technological stock=1%, Корпус=SOP-8
DD3: "DC-DC Stepdown Fixed 2A 3.3V", lcsc.com=C780769, Manufacturer=Diodes, ChipDip.ru=8025974122, GroupSpecification=4, ManufacturerPartNumber=AP63203WU-7, Mount=SMT, Storage Category="Интегральные микросхемы", Storage Subcategory="Преобразователи питания", Technological stock=1%, Корпус=TSOT-23-6
DD4 DD5: "Motor Driver 1.8A", lcsc.com=C39159, Manufacturer=TI, ChipDip.ru=9001130289, GroupSpecification=4, ManufacturerPartNumber=DRV8837DSGR, Mount=SMT, Storage Category="Интегральные микросхемы", Storage Subcategory="Преобразователи питания", Technological stock=5%, Корпус=WSON-8
FID1 FID2 FID3: library part FIDUCIAL
L1: "L 3.9uH  4.4А", Current=4.4А, Height Tolerance=0.3, lcsc.com=C2047096, Manufacturer=BOURNS, Tolerance=±20%, ChipDip.ru=8027118710, GroupSpecification=4, Height=5.3, ManufacturerPartNumber=SDR0805-3R9ML, Mount=SMT, Storage Category=Пассивные, Storage Subcategory="Индуктивности и трансформаторы", Technological stock=2%, Type="20 mOm", Корпус=7.8x7.8mm
P1 P2: "WR-PHD Pin Header, SMT, Vertical, pitch 1.27mm, 2 Row, 10P", Contact Resistance=20mOhm, Manufacturer="Wurth Elektronik", Operating Temperature Max=105°C, Operating Temperature Min=-40°C, Rated Current=1A, Withstanding Voltage=300V, Working Voltage=100V, Category="Board-to-Board Connectors", ComponentLink1Description="Website Link", ComponentLink1URL=https://www.we-online.com/redexpert/article/62101021021?ad, ComponentLink2Description="Datasheet Link", ComponentLink2URL=https://www.we-online.com/redexpert/spec/62101021021?ad, Gender="Pin Header", Manufacturer Part Number=62101021021, Match Code=WR-PHD, Mount="Surface Mount", Number of Pins=10, Number of Rows=2, Orientation=Vertical, Packaging=Tube, Pitch=1.27mm
R1 R2 R4 R7 R12 R13 R14: "R0603 390±1% 50V", AnalogPartNumber=0603WAF3900T5E, Height Tolerance=0.1, lcsc.com=C23151, Manufacturer=YAGEO, Power/Voltage=100mW, Tolerance=±1%, ChipDip.ru=9000079666, GroupSpecification=4, Height=0.45, ManufacturerPartNumber=RC0603FR-07390RL, Mount=SMT, Storage Category=Пассивные, Storage Subcategory=Резисторы, Technological stock=5%, Корпус=0603
R3 R8 R9 R16 R17 R18: "R0603 10k±1% 50V", AnalogPartNumber=0603WAF1002T5E, Height Tolerance=0.1, lcsc.com=C98220, Manufacturer=YAGEO, Power/Voltage=100mW, Tolerance=±1%, ChipDip.ru=9000079736, GroupSpecification=4, Height=0.45, ManufacturerPartNumber=RC0603FR-0710KL, Mount=SMT, Storage Category=Пассивные, Storage Subcategory=Резисторы, Technological stock=5%, Корпус=0603
R5 R6: "R0603 5R1±1% 50V", AnalogPartNumber=0603WAF1001T5E, Height Tolerance=0.1, lcsc.com=C114626, Manufacturer=YAGEO, Power/Voltage=100mW, Tolerance=±1%, ChipDip.ru=8002004042, GroupSpecification=4, Height=0.45, ManufacturerPartNumber=RC0603FR-075R1L, Mount=SMT, Storage Category=Пассивные, Storage Subcategory=Резисторы, Technological stock=5%, Корпус=0603
R10 R11: "R0603 1M±1% 50V", AnalogPartNumber=0603WAF1001T5E, Height Tolerance=0.1, lcsc.com=C105578, Manufacturer=YAGEO, Power/Voltage=100mW, Tolerance=±1%, ChipDip.ru=9000348749, GroupSpecification=4, Height=0.45, ManufacturerPartNumber=RC0603FR-071ML, Mount=SMT, Storage Category=Пассивные, Storage Subcategory=Резисторы, Technological stock=5%, Корпус=0603
R15: "R0603 240±1% 50V", AnalogPartNumber=0603WAF2400T5E, Height Tolerance=0.1, lcsc.com=C23350, Manufacturer=YAGEO, Power/Voltage=100mW, Tolerance=±1%, ChipDip.ru=9000079625, GroupSpecification=4, Height=0.45, ManufacturerPartNumber=RC0603FR-07240RL, Mount=SMT, Storage Category=Пассивные, Storage Subcategory=Резисторы, Technological stock=5%, Корпус=0603
SW1 SW2 SW3: "Switch Tacticle (button) 4.7x1.9mm angle", lcsc.com=C393942, Manufacturer="Shou HAN", ChipDip.ru=8020502681, GroupSpecification=4, Link=https://www.lcsc.com/product-detail/C393942.html, ManufacturerPartNumber=TS24CA, Mount=SMT, Storage Category=Механика, Storage Subcategory="Кнопки и переключатели", Technological stock=2%, Корпус=SMD,4.7x1.9mm
TP1 TP2 TP3 TP4 TP5 TP6 TP7 TP8 TP9: library part "TEST POINT", "Test Point", GroupSpecification=4, Mount=PCB, Storage Category=NULL, Storage Subcategory=NULL, Type=TestPoint
TRGT: library part PrinterTarget_10mm, "SMD Printer calibration PCB thikness target"
VD1: "ESD Suppressor Diode TVS RS485", lcsc.com=C521963, Manufacturer="TECH PUBLIC", Power/Voltage="15 V", ChipDip.ru=9000855347, GroupSpecification=4, ManufacturerPartNumber=SM712, Mount=SMT, Storage Category=Дискретные, Storage Subcategory=Диоды, Technological stock=5%, Корпус=SOT-23-3
VD2: "LED RGB 3210 ANGLE", AnalogPartNumber=MHS110FRGBCT, lcsc.com=C496820, Manufacturer="Wurth Elec", ChipDip.ru=8003216021, GroupSpecification=4, ManufacturerPartNumber=155124M173200, Mount=SMT, Storage Category=Оптика, Storage Subcategory=Светодиод, Technological stock=2%, Type=RGB, Корпус=SMD-3210
VD3 VD4 VD5: "ESD Suppressor Diode TVS 3V3", lcsc.com=C70371, Manufacturer=Nexperia, Power/Voltage="150 W", ChipDip.ru=9002042105, GroupSpecification=4, ManufacturerPartNumber=PESD3V3S1UL,315, Mount=SMT, Storage Category=Дискретные, Storage Subcategory=Диоды, Technological stock=5%, Корпус=SOD-882
VD6: "Zener Diode 3.3V SOD-123", lcsc.com=C24672, Manufacturer=onsemi, ChipDip.ru=8002034742, GroupSpecification=4, ManufacturerPartNumber=MMSZ4684T1G, Mount=SMT, Storage Category=Дискретные, Storage Subcategory=Диоды, Technological stock=2%, Корпус=SOD-123
X1: "Connector, пружинный контакт для аккумулятора, шаг 2.5мм", lcsc.com=C3035810, Manufacturer="Kyocera AVX", ChipDip.ru=8004951164, ManufacturerPartNumber=009155005541006, Mount=SMD, Storage Category=Разъемы, Storage Subcategory="Разъемы низкоскоростные", System=Connector, Technological stock=1%
X2: "Connector Molex PicoBlade SMD 6pin", lcsc.com=C2845383, Manufacturer=MOLEX, ChipDip.ru=9000714914, GroupSpecification=4, ManufacturerPartNumber=532610671, Mount=SMD, Storage Category=Разъемы, Storage Subcategory="Разъемы силовые", System=Connector, Technological stock=1%
X3: "Connector Molex PicoBlade SMD 2pin", lcsc.com=C177225, Manufacturer=MOLEX, ChipDip.ru=9000658519, GroupSpecification=4, ManufacturerPartNumber=532610271, Mount=SMD, Storage Category=Разъемы, Storage Subcategory="Разъемы силовые", System=Connector, Technological stock=1%
X4: "Header, 6-Pin", ManufacturerPartNumber=PLS-6, Mount=THT, Storage Category=Разъемы, Storage Subcategory="Разъемы низкоскоростные", System=Connector, Technological stock=1%
Z1: "Crystal 8MHz 12pF", Height Tolerance=0.1, lcsc.com=C2682775, Manufacturer="YXC Crystal Oscillators", Tolerance=±10ppm, ChipDip.ru=8013011769, GroupSpecification=4, Height=0.7, ManufacturerPartNumber=X32258MOB4SI, Mount=SMT, smd.ru=SX3225-12.000-12, Storage Category=Пассивные, Storage Subcategory="Резонаторы и генераторы", Technological stock=1%, Корпус=SMD3225

## Via types
v1: diameter 0.6, hole 0.3, TOP to BOTTOM, tented both sides, 177 vias

## Nets (pads, with @x,y where several pads share a name; then routed paths per layer and width w, separated by ;. In a path a pad name is that pad's centre, name@x,y a point inside that pad or via, vN(x,y) a via of type N, cw(c..) or ccw(c..) an arc to the next point about the centre after c; other vN are vias at no path point)
1WIRE: C28.1 DD1.29 R2.2 R15.2 VD6.1 | length 35.3
  TOP w0.25: v1(21.7,47.9) 23.4,47.9 30.85,40.45 DD1.29
  TOP w0.381: R15.2 12.763,60.512 14.238,60.512 C28.1 R2.2@15.6,60.5 ; v1(15,58.2) VD6.1 ; VD6.1@15.1,59.2 15.31,59.41 15.31,59.51 15.49,59.69 15.49,60.39 R2.2@15.6,60.5 ; R2.2 R2.2@15.6,60.5
  BOTTOM w0.381: v1(15,58.2) 15,53.4 20.5,47.9 v1(21.7,47.9)
3V3: C8.2 C9.2 C10.2 C11.2 C12.2 C14.2 C15.2 C16.2 C17.2 C18.2 C19.2 C20.2 C21.2 C22.2 C23.2 C24.1 C25.2 C26.2 DD1.1 DD1.9 DD1.24 DD1.48 DD2.8 DD3.1 DD4.1 DD4.8 DD5.1 DD5.8 L1.2 P1.1 P2.1 R1.1 R9.1 R10.2 R17.2 R18.2 SW3.2 SW3.3 SW3.4 TP2.1 VD2.1 VD5.1 X2.5 X4.3 | length 104.5
  TOP w0.25: R9.1 v1(22.85,20) ; C14.2 24.733,27.267 24.833,27.267 v1(24.9,27.2) ; C14.2@23.9,28.1 23.9,28.4 24.025,28.525 24.035,28.525 25.235,29.725 25.875,29.725 DD1.48 ; C15.2@24.9,26.1 C15.2 ; C10.2 27.1,26.35 27.1,27 27.35,27.25 DD1.1 ; DD1.9 31.35,27.15 32.273,26.227 32.273,25.566 32.7,25.139 v1(32.7,25.1) ; DD1.24 35.75,35.25 36.2,35.7 36.2,36.45 C12.2 v1(35.2,36.5) ; R18.2 R17.2 v1(39.25,34.95)
  TOP w0.3: VD5.1 22,71.575 22.425,72 23,72 X4.3
  TOP w0.35: X2.5 5.45,21.2 6.4,21.2 v1(6.8,21.6)
  TOP w0.4: C9.2 12,53.825 12.375,54.2 13,54.2 13.25,54.45 R10.2 ; P2.1 15.205,11.795 15.205,9.805 v1(15.2,9.8) 23.034,1.966 23.034,-1.134 SW3.3 ; R1.1 19.4,63.5 20,62.9 C16.2 ; SW3.2 24.9,-1.6 24.7,-1.4 23.3,-1.4 SW3.3 ; DD3.1 29.75,65.85 31.7,63.9 v1(31.7,55.729) ; VD2.1 27,-11 23.1,-7.1 SW3.4 23,-5.3 23,-1.3 SW3.3
  TOP w0.5: C15.2@24.9,26.1 v1(24.9,27.2) ; C15.2@25.25,26.25 C10.2
  BOTTOM w0.4: TP2.1 v1(31.7,55.729)
  BOTTOM w0.6: X4.3 25.9,71.1 30.2,71.1 31.7,69.6 v1(31.7,55.729) ; P1.1 37.04,46 v1(38.1,46)
  other v1: 17.8,27.1 11.2,27.9 11.9,28.6 17.9,31 21.5,50.4 20.5,51.4 22.4,51.4 36.1,52.7 36.1,54
24V0: C1.1 C2.2 C4.2 C5.2 C6.2 DD3.3 R3.1 TP1.1 X1.1 | length 1.3
  BOTTOM w0.4: v1(36.2,67.7) TP1.1
BOOT0: DD1.44 R16.2 SW3.1 | length 51.8
  TOP w0.25: R16.2 23.75,31.25 24.25,31.75 DD1.44 31.45,31.75 33.25,29.95 33.25,29.35 35.2,27.4 v1(35.2,25.4) ; SW3.1 26.2,-5 26.9,-4.3 26.9,-0.1 31.1,4.1 v1(31.1,18.4)
  BOTTOM w0.25: v1(31.1,18.4) 31.1,21.3 v1(35.2,25.4)
CTS: X4.2
DE: DD1.33 DD2.3 R11.1 | length 34.2
  TOP w0.25: v1(17.7,44.9) 22.4,44.9 28.85,38.45 DD1.33
  TOP w0.381: v1(8.5,55.9) 8.508,55.892 9.893,55.892 DD2.3 10.4,55.885 11.255,56.74 11.64,56.74 11.75,56.85 R11.1
  BOTTOM w0.25: v1(8.5,55.9) 17.7,46.7 v1(17.7,44.9)
DRIVE1: DD1.40 DD4.6 | length 26
  TOP w0.25: DD4.6 v1(12.6,22.5) ; DD1.40 27.755,33.75 28.105,33.4 v1(28.2,33.4)
  BOTTOM w0.25: v1(12.6,22.5) 14.3,22.5 15.1,23.3 15.1,24.4 16.1,25.4 18.8,25.4 22.5,29.1 22.5,31.9 24,33.4 v1(28.2,33.4)
DRIVE2: DD1.41 DD4.5 | length 25
  TOP w0.25: DD4.5 12,22 12.2,21.8 v1(13,21.8) ; DD1.41 27.095,33.25 27.545,32.8 v1(27.6,32.8)
  BOTTOM w0.25: v1(13,21.8) 14.6,21.8 15.7,22.9 15.7,24.1 16.4,24.8 19.1,24.8 23.1,28.8 23.1,31.6 24.3,32.8 v1(27.6,32.8)
DRIVE_M1: DD4.2 TP3.1 X2.1 | length 8
  TOP w0.25: v1(3.8,26) X2.1 5.461,25.789 6.211,25.789 9,23 DD4.2
  BOTTOM w0.25: TP3.1 v1(3.8,26)
DRIVE_M2: DD4.3 TP5.1 X2.6 | length 8
  TOP w0.25: v1(3.8,19.7) 3.825,19.725 5.225,19.725 5.464,19.964 6.464,19.964 9,22.5 DD4.3
  BOTTOM w0.25: TP5.1 v1(3.8,19.7)
DRIVE_QUAD_A: DD1.42 TP8.1 X2.3 | length 30.9
  TOP w0.25: v1(3.8,23.7) 3.895,23.7 4.095,23.5 X2.3 ; v1(20.9,33) 22.5,33 22.75,32.75 DD1.42
  BOTTOM w0.25: TP8.1 2.775,23.725 3.775,23.725 v1(3.8,23.7) 4.3,23.2 7.7,23.2 11.7,27.2 14.9,27.2 15.3,26.8 16.3,26.8 17.4,27.9 18.4,27.9 20.9,30.4 v1(20.9,33)
DRIVE_QUAD_B: DD1.43 TP7.1 X2.4 | length 30.7
  TOP w0.25: v1(3.8,22.1) 3.895,22.1 4.045,22.25 X2.4 ; v1(21.7,32.3) 21.75,32.25 DD1.43
  BOTTOM w0.25: TP7.1 2.8,22.05 3.75,22.05 v1(3.8,22.1) 4.3,22.6 8.1,22.6 12.1,26.6 14.6,26.6 15,26.2 18.1,26.2 21.7,29.8 v1(21.7,32.3)
DTR: X4.6
GND: C1.2 C2.1 C3.2 C4.1 C5.1 C6.1 C7.2 C8.1 C9.1 C10.1 C11.1 C12.1 C14.1 C15.1 C16.1 C17.1 C18.1 C19.1 C20.1 C21.1 C22.1 C23.1 C24.2 C25.1 C26.1 C28.2 DD1.8 DD1.23 DD1.47 DD2.5 DD3.4 DD4.4 DD4.9 DD5.4 DD5.9 P1.3 P1.5 P1.9 P2.3 P2.5 P2.9 R7.1 R8.2 R11.2 R16.1 SW1.2 SW1.3 SW1.4 SW2.2 SW2.3 SW2.4 TP9.1 VD1.3 VD3.2 VD4.2 VD5.2 VD6.2 X1.2 X1.P1 X1.P2 X2.2 X2.P1 X2.P2 X3.P1 X3.P2 X4.1 Z1.2 Z1.4 | length 2
  TOP w0.3: Z1.2 31.6,22.05 C7.2
  other v1: 26,-13 35.3,-12.9 23,-10 38.2,-7.7 35,-5 43.6,-2.3 39,0 49,1 2,2 8,2 14,2 19,2 26,2 45,3 49,6 2,8 8,8 14,8 26,8 34,8 45,9 17.1,10 49,11 21.3,11.8 38,12 2,14 45,14 26,15 34,15 49,16 45,19 32.4,20.4 24,20.8 12.6,21 49,21 9.315,21.213 10.5,22.75 2,23 26.9,23.4 21.375,24.675 14.5,24.7 3.9,24.8 30,24.9 33.8,25.1 14.3,25.9 30.7,26.9 16.5,29.3 43,30 49,30 24.5,30.7 29.8,30.9 2,31 14.75,31.25 20.3,32.3 28.4,32.6 2,33 37,35.2 22.9,35.4 2,37 26.6,37.1 43,39 7,40 31.6,40.1 49,41 11.4,41.6 2,42 22,43 35.1,44 43,44 16.6,44.8 7,45 30.9,45.9 49,46 2,47 18.8,48 29,48 9,49 43,49 49,51 9,52.4 13.8,53.5 18.2,53.5 18.2,55.9 49,56 2.3,56.6 8.6,56.8 10.9,58.3 13.6,58.3 18.2,58.5 35.7,58.5 1,60.3 17.2,60.4 35.7,60.4 3.5,60.6 49,61 22.5,62.9 35.7,63 43,63 14.3,63.1 3,63.2 11.5,64 -0.2,64.1 23.4,64.2 35.7,64.6 49,66 16.1,66.7 10.7,67.5 5,68.7 24,69.5 26.5,69.5 29.1,69.5 20.7,69.7 17.1,69.8 49,71 9.1,72.8 12.5,73.7 36,74 41,74 46,74 7.9,74.1
LED_B: DD1.14 R12.1 | length 43.6
  TOP w0.25: R12.1 28.5,-0.4 39.75,10.85 39.75,25.95 35.475,30.225 34.325,30.225 DD1.14
LED_G: DD1.16 R13.1 | length 44.7
  TOP w0.25: R13.1 30.25,0.45 40.5,10.7 40.5,26.5 35.75,31.25 DD1.16
LED_R: DD1.17 R14.1 | length 45.6
  TOP w0.25: R14.1 32,1.25 41.3,10.55 41.3,27 36.55,31.75 DD1.17
MCU_RX: DD1.31 DD2.1 VD3.1 X4.4 | length 60.4
  TOP w0.25: v1(16.6,46.4) 22.9,46.4 29.85,39.45 DD1.31
  TOP w0.3: VD3.1 20.025,70.75 20.201,70.926 v1@20.201,71.599 ; v1(20.2,71.6) 20.2,71.67 21.46,72.93 X4.4
  TOP w0.381: v1(9.9,52.3) DD2.1
  BOTTOM w0.25: v1(16.6,46.4) 10.7,52.3 v1(9.9,52.3) 9.9,53.7 8.7,54.9 8.3,54.9 7.7,55.5 7.7,57.6 14.9,64.8 14.9,70.1 16.4,71.6 v1(20.2,71.6)
MCU_TX: DD1.30 DD2.4 VD4.1 X4.5 | length 54.9
  TOP w0.25: v1(18.266,47.2) 23.1,47.2 30.35,39.95 DD1.30
  TOP w0.3: v1(17.1,70.8) 17.15,70.75 VD4.1 18.1,72.18 X4.5
  TOP w0.4: DD2.4 10,57.255 v1(10,58)
  BOTTOM w0.25: v1(17.1,70.8) 18.1,69.8 18.1,64.8 13.9,60.6 11.8,60.6 10,58.8 v1(10,58) 10,55.466 v1(18.266,47.2)
MOTOR_EN: DD1.12 DD4.7 DD5.7 R8.1 | length 31.3
  TOP w0.25: DD4.7 11.9,23 12.4,23.5 R8.1 13,23.35 13.95,22.4 15,22.4 16.75,24.15 DD5.7 ; v1(30.5,30.3) 32.104,30.3 32.85,29.554 DD1.12
  BOTTOM w0.25: v1(16.7,24.1) 19.5,24.1 25.7,30.3 v1(30.5,30.3)
NetC13_1: C13.1 DD3.5 L1.1
NetC13_2: C13.2 DD3.6 | length 2.6
  TOP w0.4: DD3.6 26.025,63.225 26.025,63.825 26.375,64.175 27.675,64.175 C13.2
NetDD2_6: DD2.6 R5.1 | length 5.5
  TOP w0.381: DD2.6 5.485,55.885 7.25,57.65 R5.1
NetDD2_7: DD2.7 R6.1 | length 7.3
  TOP w0.381: DD2.7 5.415,54.615 8.75,57.95 R6.1
NetR1_2: R1.2 R2.1 | length 2.5
  TOP w0.4: R2.1 16.5,62 17,62.5 R1.2
NetR4_1: R4.1 R7.2 | length 1.6
  TOP w0.25: R7.2 19.1,65.25 R4.1
NetR12_2: R12.2 VD2.2 | length 3.8
  TOP w0.3: R12.2 28.5,-8.7 29.3,-9.5 VD2.2
NetR13_2: R13.2 VD2.3 | length 3.4
  TOP w0.3: VD2.3 30.2,-7.3 R13.2
NetR14_2: R14.2 VD2.4 | length 4.1
  TOP w0.3: VD2.4 31.15,-9.65 32,-8.8 R14.2
NetR15_1: R15.1 X1.5 | length 8.1
  TOP w0.381: X1.5 5.2,60.95 6.15,60 9.675,60 10.2,60.525 R15.1
OSC_IN: C3.1 DD1.5 Z1.1 | length 9.4
  TOP w0.25: C3.1 29.35,21.85 Z1.1 28.935,22.365 28.535,22.365 28.2,22.7 28.2,24.5 29.35,25.65 DD1.5
OSC_OUT: C7.1 DD1.6 Z1.3 | length 7.4
  TOP w0.25: DD1.6 29.85,26.45 31.6,24.7 Z1.3 ; Z1.3@31.5,23.6 33.45,23.6 C7.1
PA0: DD1.10
PA1: DD1.11
PA3: DD1.13
PA5: DD1.15
PEEL1: DD1.39 DD5.6 | length 15.7
  TOP w0.25: v1(15.6,27.6) 15.627,27.627 16.027,27.627 16.25,27.85 DD5.6 ; v1(22.3,34) 22.395,34 22.645,34.25 DD1.39
  BOTTOM w0.25: v1(15.6,27.6) 15.6,30 19.6,34 v1(22.3,34)
PEEL2: DD1.38 DD5.5 | length 15.4
  TOP w0.25: v1(15,28.6) 15.25,28.35 DD5.5 ; v1(22.3,34.8) 22.35,34.75 DD1.38
  BOTTOM w0.25: v1(15,28.6) 15,30.4 19.4,34.8 v1(22.3,34.8)
PEEL_M1: DD5.2 TP4.1 X3.1 | length 9.2
  TOP w0.25: DD5.2 16.75,30.95 17.125,31.325 X3.1 17.113,32.762 17.113,34.287 v1(17.1,34.3)
  BOTTOM w0.25: v1(17.1,34.3) 17.1,36.4 17.6,36.9 TP4.1@17.6,39.1
PEEL_M2: DD5.3 TP6.1 X3.2 | length 9.1
  TOP w0.25: v1(15.9,34.3) 15.888,34.288 15.888,32.763 X3.2 15.875,31.425 16.25,31.05 DD5.3
  BOTTOM w0.25: TP6.1 15.5,36.9 15.9,36.5 v1(15.9,34.3)
PWR_EN: DD3.2 R3.2 R4.2 | length 7.5
  TOP w0.25: R3.2 20.25,66.45 20.75,65.95 R4.2 20.9,64.95 24.825,64.95 24.996,65.121 24.996,65.846 DD3.2
R\E\: DD1.32 DD2.2 R10.1 | length 35
  TOP w0.25: v1(15.8,45.7) 22.6,45.7 29.35,38.95 DD1.32
  TOP w0.381: v1(8.3,54.2) 8.342,54.242 8.342,54.325 8.624,54.608 9.892,54.608 DD2.2 10.4,54.615 11.025,55.24 11.64,55.24 11.75,55.35 R10.1
  BOTTOM w0.25: v1(8.3,54.2) 8.3,52.1 8.9,51.5 10,51.5 v1(15.8,45.7)
RESET: DD1.7 P1.10 P2.10 R9.2 | length 49.2
  TOP w0.25: P2.10 20.35,15.56 R9.2 20.35,20.75 20.9,21.3 22.7,21.3 23.3,21.9 v1(23.3,26.9) ; v1(30.1,29.6) 30.35,29.35 DD1.7
  BOTTOM w0.25: v1(23.3,26.9) 26,29.6 v1(30.1,29.6) 30.8,29.6 31.2,30 31.2,32.2 27.5,35.9 26.5,35.9 25.9,36.5 25.9,38.5 30,42.6 30,46.5 31.725,48.225 31.725,49.365 P1.10
RS-485+: R5.2 VD1.2 X1.4 | length 5.4
  TOP w0.381: X1.4 7.15,64.517 8.131,63.83 8.412,63.609 VD1.2 7.25,62.443 R5.2
RS-485-: R6.2 VD1.1 X1.3 | length 6.8
  TOP w0.381: X1.3 8.078,66.498 9.413,65.163 VD1.1 9.646,65.019 9.646,63.121 8.75,62.225 R6.2
SW1: DD1.19 R17.1 SW1.1 | length 42.1
  TOP w0.25: DD1.19 35.45,32.75 36.3,33.6 37.575,33.6 R17.1@37.75,33.775 ; SW1.1 42.7,0.854 42.7,27.8 38.5,32 38.5,33.4 38.3,33.6 37.925,33.6 R17.1@37.75,33.775 ; R17.1@37.75,33.775 R17.1 R17.1@37.75,33.775
SW2: DD1.18 R18.1 SW2.1 | length 48.7
  TOP w0.25: DD1.18 37.6,32.25 R18.1 37.75,31.65 42.05,27.35 42.05,10.3 35.2,3.45 35.2,-2.346 SW2.1
SWCLK: DD1.37 P1.4 P2.4 | length 60
  TOP w0.25: P2.4 16.48,18.48 20.4,22.4 21.6,22.4 22.4,23.2 v1(22.4,24.555) ; DD1.37 25.9,37.5 26.533,38.133 26.833,38.133 v1(26.9,38.2)
  BOTTOM w0.25: v1(22.4,24.555) 23.745,25.9 24.9,25.9 27.7,28.7 31,28.7 31.9,29.6 31.9,32.578 27.3,37.178 27.3,37.8 v1(26.9,38.2) 28,39.3 34.3,39.3 38.9,43.9 38.9,46.5 37.8,47.6 36.7,47.6 36.025,48.275 36.025,49.345 P1.4
SWDIO: DD1.34 P1.2 P2.2 | length 59.2
  TOP w0.25: P2.2 15.21,18.41 20,23.2 21.1,23.2 v1(21.6,23.7) ; v1(27.9,38.2) 28.35,37.75 DD1.34
  BOTTOM w0.25: v1(21.6,23.7) 22.7,23.7 24.1,25.1 25.2,25.1 28,27.9 31.2,27.9 32.6,29.3 32.6,32.9 27.9,37.6 v1(27.9,38.2) 34.6,38.2 39.8,43.4 39.8,46.8 38.075,48.525 37.295,48.525 37.04,48.78 P1.2
pads on no net: DD1.2 DD1.3 DD1.4 DD1.20 DD1.21 DD1.22 DD1.25 DD1.26 DD1.27 DD1.28 DD1.35 DD1.36 DD1.45 DD1.46 FID1.FID FID2.FID FID3.FID P1.6 P1.7 P1.8 P2.6 P2.7 P2.8 SW1.O10 SW2.O10 SW3.O10

## Polygon pours and split planes (outlines as drawn)
GND on TOP "GND_L1_P-001" (solid, remove dead copper, pour order 10): -2,75 -2,-14 50,-14 50,75
3V3 on TOP "TOP-3V3" (solid, remove dead copper, pour order 6): 1.9,52.5 4.6,49.8 35.2,49.8 37.1,51.7 37.1,56.2 31.5,56.2 30.8,55.5 21.8,55.5 20.6,56.7 20.6,60.7 20.4,60.9 19.6,60.9 19.6,60.1 19.3,59.8 19.3,51.8 13.4,51.8 12.6,52.6 12.6,54.4 11.4,54.4 11.4,52.6 10.5,51.7 8.6,51.7 6.4,53.9 3.3,53.9 1.9,53.9
3V3 on TOP "3V3_3_L1_P-001" (solid, remove dead copper, pour order 4): 18.1,31.7 17.2,30.8 17.2,30 17.5,30 17.5,28.6 17.2,28.6 17.2,28.1 17.5,28.1 17.5,26.7 19.2,26.7 19.2,27.5 19.6,27.9 19.6,30.6 19.2,31 19.2,31.7
3V3 on TOP "3V3_2_L1_P-001" (solid, remove dead copper, pour order 3): 8.3,24.4 9.3,23.4 9.4,23.5 9.8,23.5 9.8,23.8 11.2,23.8 11.2,23.4 12.4,23.4 12.4,29.1 10.7,29.1 10.7,27 8.5,27 8.3,26.8
NetC13_1 on TOP "NetC13_1_L1_P-001" (solid, remove dead copper, pour order 1): 24.7,63.7 24.7,62.6 23.6,61.5 21.7,61.5 21.7,58.5 29.8,58.5 29.8,61.5 28.6,61.5 28.1,62 28.1,63.1 27.4,63.1 27.4,62.2 25.7,62.2 25.3,62.6 25.3,63.7
24V0 on TOP "24V0_L1_P-001" (solid, remove dead copper, pour order 0): 10.625,72.15 9.55,71.075 9.55,70.225 12.25,67.525 20.575,67.525 21.7,66.4 21.7,65.4 21.8,65.3 24.4,65.3 24.4,66.6 24.6,66.8 37,66.8 37,72.1 32.2,72.1 31.4,71.3 31.4,69.5 30.3,68.4 23,68.4 22.4,69 16.1,69 12.8,72.3 10.8,72.3
3V3 on GND_B "3V3_L3_P-001" (solid, remove dead copper, pour order 9): -2,75 -2,-14 50,-14 50,75
GND on GND_T "GND_L2_P-001" (solid, remove dead copper, pour order 7): -2,75 -2,-14 50,-14 50,75
GND on BOTTOM "GND_L4_P-001" (solid, remove dead copper, pour order 8): -2,75 -2,-14 50,-14 50,75

## Other copper
TOP:
  pour cut-out: 4,35 ccw(c8,35) 8,31 ccw(c8,35) 12,35 ccw(c8,35) 8,39 ccw(c8,35)
  pour cut-out: 42,34 ccw(c46,34) 46,30 ccw(c46,34) 50,34 ccw(c46,34) 46,38 ccw(c46,34)
  pour cut-out: 42,25 ccw(c46,25) 46,21 ccw(c46,25) 50,25 ccw(c46,25) 46,29 ccw(c46,25)
  pour cut-out: 40.5,69 cw(c44.5,69) 44.5,73 cw(c44.5,69) 48.5,69 cw(c44.5,69) 44.5,65 cw(c44.5,69)
  pour cut-out: 40.5,57 ccw(c44.5,57) 44.5,53 ccw(c44.5,57) 48.5,57 ccw(c44.5,57) 44.5,61 ccw(c44.5,57)
  pour cut-out: 33,21 ccw(c37,21) 37,17 ccw(c37,21) 41,21 ccw(c37,21) 37,25 ccw(c37,21)
  pour cut-out: 8,12.5 ccw(c8,16.5) 12,16.5 ccw(c8,16.5) 8,20.5 ccw(c8,16.5) 4,16.5 ccw(c8,16.5)
  pour cut-out: 30.3,21.1 30.7,21.1 30.7,24.4 30.3,24.4
  pour cut-out: 28.7,23 28.7,22.45 32.5,22.45 32.5,23.025 28.75,23.025
  pour cut-out: 24.622,63.888 24.622,65.442 26.425,65.442 26.425,63.888
  pour cut-out: 21.496,58.5 30,58.5 30,55.5 21.496,55.5
  pour cut-out: 14.63,16.9 14.63,14.1 20.87,14.1 20.87,16.9
GND_T:
  pour cut-out: 4,35 cw(c8,35) 8,39 cw(c8,35) 12,35 cw(c8,35) 8,31 cw(c8,35)
  pour cut-out: 4,16.5 cw(c8,16.5) 8,20.5 cw(c8,16.5) 12,16.5 cw(c8,16.5) 8,12.5 cw(c8,16.5)
  pour cut-out: 33,21 cw(c37,21) 37,25 cw(c37,21) 41,21 cw(c37,21) 37,17 cw(c37,21)
  pour cut-out: 42,25 cw(c46,25) 46,29 cw(c46,25) 50,25 cw(c46,25) 46,21 cw(c46,25)
  pour cut-out: 42,34 cw(c46,34) 46,38 cw(c46,34) 50,34 cw(c46,34) 46,30 cw(c46,34)
  pour cut-out: 40.5,57 cw(c44.5,57) 44.5,61 cw(c44.5,57) 48.5,57 cw(c44.5,57) 44.5,53 cw(c44.5,57)
  pour cut-out: 40.5,69 cw(c44.5,69) 44.5,73 cw(c44.5,69) 48.5,69 cw(c44.5,69) 44.5,65 cw(c44.5,69)
GND_B:
  pour cut-out: 4,35 cw(c8,35) 8,39 cw(c8,35) 12,35 cw(c8,35) 8,31 cw(c8,35)
  pour cut-out: 4,16.5 cw(c8,16.5) 8,20.5 cw(c8,16.5) 12,16.5 cw(c8,16.5) 8,12.5 cw(c8,16.5)
  pour cut-out: 33,21 cw(c37,21) 37,25 cw(c37,21) 41,21 cw(c37,21) 37,17 cw(c37,21)
  pour cut-out: 42,25 cw(c46,25) 46,29 cw(c46,25) 50,25 cw(c46,25) 46,21 cw(c46,25)
  pour cut-out: 42,34 cw(c46,34) 46,38 cw(c46,34) 50,34 cw(c46,34) 46,30 cw(c46,34)
  pour cut-out: 40.5,57 cw(c44.5,57) 44.5,61 cw(c44.5,57) 48.5,57 cw(c44.5,57) 44.5,53 cw(c44.5,57)
  pour cut-out: 40.5,69 cw(c44.5,69) 44.5,73 cw(c44.5,69) 48.5,69 cw(c44.5,69) 44.5,65 cw(c44.5,69)
BOTTOM:
  pour cut-out: 4,16.5 cw(c8,16.5) 8,20.5 cw(c8,16.5) 12,16.5 cw(c8,16.5) 8,12.5 cw(c8,16.5)
  pour cut-out: 4,35 cw(c8,35) 8,39 cw(c8,35) 12,35 cw(c8,35) 8,31 cw(c8,35)
  pour cut-out: 33,21 cw(c37,21) 37,25 cw(c37,21) 41,21 cw(c37,21) 37,17 cw(c37,21)
  pour cut-out: 42,25 cw(c46,25) 46,29 cw(c46,25) 50,25 cw(c46,25) 46,21 cw(c46,25)
  pour cut-out: 42,34 cw(c46,34) 46,38 cw(c46,34) 50,34 cw(c46,34) 46,30 cw(c46,34)
  pour cut-out: 40.5,57 cw(c44.5,57) 44.5,61 cw(c44.5,57) 48.5,57 cw(c44.5,57) 44.5,53 cw(c44.5,57)
  pour cut-out: 40.5,69 cw(c44.5,69) 44.5,73 cw(c44.5,69) 48.5,69 cw(c44.5,69) 44.5,65 cw(c44.5,69)

## Silkscreen, mask and mechanical layers (free items; w line width, h text height)
Top Overlay:
  lines w0.1: 11.25,46.925 13.75,46.925 13.75,48.225 11.25,48.225 11.25,46.925 ; 11.25,48.425 13.75,48.425 13.75,49.725 11.25,49.725 11.25,48.425 ; 11.275,44.4 15.825,44.4 15.825,46.6 11.275,46.6 11.275,44.4 ; 14.1,48 15.775,48 15.775,51.15 14.1,51.15 14.1,48 ; 16.35,44.4 20.9,44.4 20.9,46.6 16.35,46.6 16.35,44.4 ; 16.35,46.875 20.9,46.875 20.9,49.075 16.35,49.075 16.35,46.875 ; 16.35,49.325 20.9,49.325 20.9,51.525 16.35,51.525 16.35,49.325
  lines w0.15: 16.3,63.425 16.5,63.5 ; 16.4,60.525 17.1,61.25 ; 20.625,63.9 21.025,64.4 ; 23.75,33.75 24.35,30.3 ; 27.05,66.95 27.225,66.3
  lines w0.254: 1.4,52 38,52 38,72 ; 4.6,16.5 5.5,16.5 ; 4.646,16.461 5.546,16.461 cw(c8.046,16.461) 8.046,18.961 34.546,18.961 34.546,20.961 cw(c37.046,20.961) 37.046,23.461 40.046,23.461 40.046,37.961 12.046,37.961 12.046,29.45 ; 7.546,29.461 12.05,29.45 ; 20,52 28,52 ; 21,63.25 21.65,63.7 ; 34.5,19 34.5,21 cw(c37,21) 37,23.5 40,23.5
Bottom Overlay:
  text "DTR" at 17.75,71.5 h2 r90
  text "RX" at 20.25,71.5 h2 r90
  text "TX" at 22.75,71.5 h2 r90
  text "3V3" at 25.25,71.5 h2 r90
  text "CTS" at 27.75,71.5 h2 r90
  text "GND" at 30.25,71.5 h2 r90
  text "GND" at 8.95,41.05 h2
Top Solder:
  rectangle: 25.15,29.55 26.65,35.45
  rectangle: 33.55,29.55 35.05,35.45
  rectangle: 27.15,27.55 33.05,29.05
  rectangle: 27.15,35.95 33.05,37.45
Board:
  circle w0.254: c44.5,69 r1.6
  circle w0.254: c44.5,57 r1.6
  circle w0.254: c8,35 r1.6
  circle w0.254: c8,16.5 r1.6
  circle w0.254: c37,21 r1.6
  circle w0.254: c46,25 r1.6
  circle w0.254: c46,34 r1.6
  lines w0.254: -1.35,65.05 ccw(c-0.33,64.349) -1.025,63.325 -0.513,62.963 cw(c-1.205,61.975) 0,61.925 0,56 1,55 1,35 0,34 0,0 20.993,-0.007 cw(c20.993,-1.014) 22,-1 22.007,-13 ccw(c23,-13.007) 23,-14 36,-14 50,0 50,74 ccw(c49,74) 49,75 25.55,75 5.55,75 -1.35,65.05
Fab Notes:
  text "©" at 24.556,105.472 h3
  text "2026       AVERLABS" at 26.406,105.472 h3
  text "S/N" at -9.094,105.447 h3
  text ".SerialNumber" at -3.094,103.447 h3
  text "OpenPNP FEEDER 1U" at 24.687,101.7 h3
  text "VAR" at -10.094,98.447 h3
  text "ASSY NO.: XXXXXX" at 24.687,97.89 h3
  text ".VariantName" at -3.094,96.447 h3
  text "REV" at -10.094,91.447 h3
  text ".VersionControl_RevNumber" at -3.094,89.447 h3
  text "NOTE" at -10.644,84.847 h3
  text "VIA IPC-4761 TYPE Ib" at -2.822,83.447 h4

## Text inside footprints (layer, text, board x,y; h text height)
C1: Top Overlay "+" at 34.5,71.35 h1.22 r90
C24: Top Overlay "+" at 33.6,51.4 h1.22 r270